# Altium PCB V2.5.0_ChipSat.PcbDoc (part 1 of 2)
Units mm, origin at the board's own origin, x right, y up, seen from the top; angles counter-clockwise.
Board outline 50 x 60 mm, 2 copper layers (Top Layer, Bottom Layer), stack 1.57 mm thick; 76 components, 53 nets, 284 pads, 115 vias.
Unrouted connection lines stored in the file: 2.
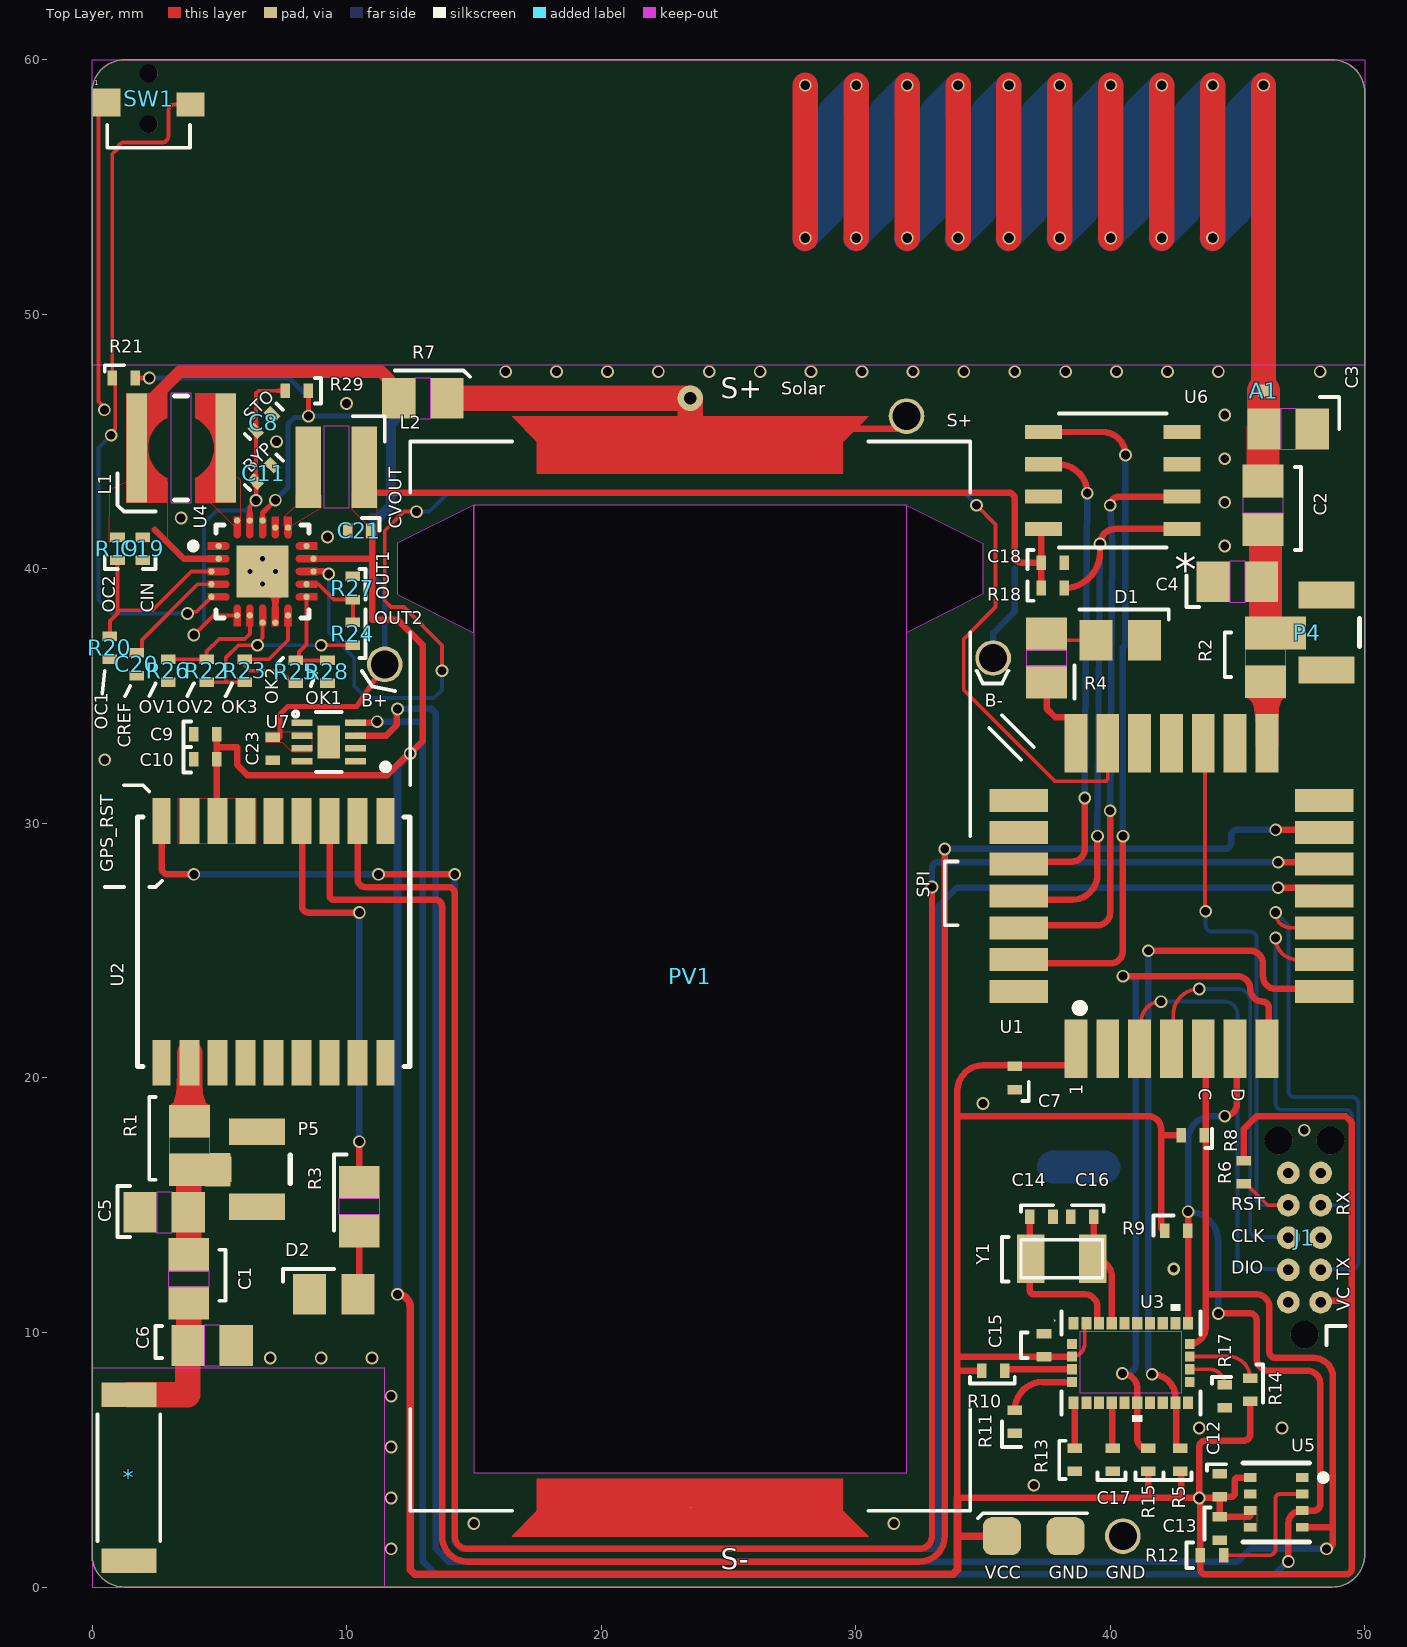
[diagram p0: Top Layer view]
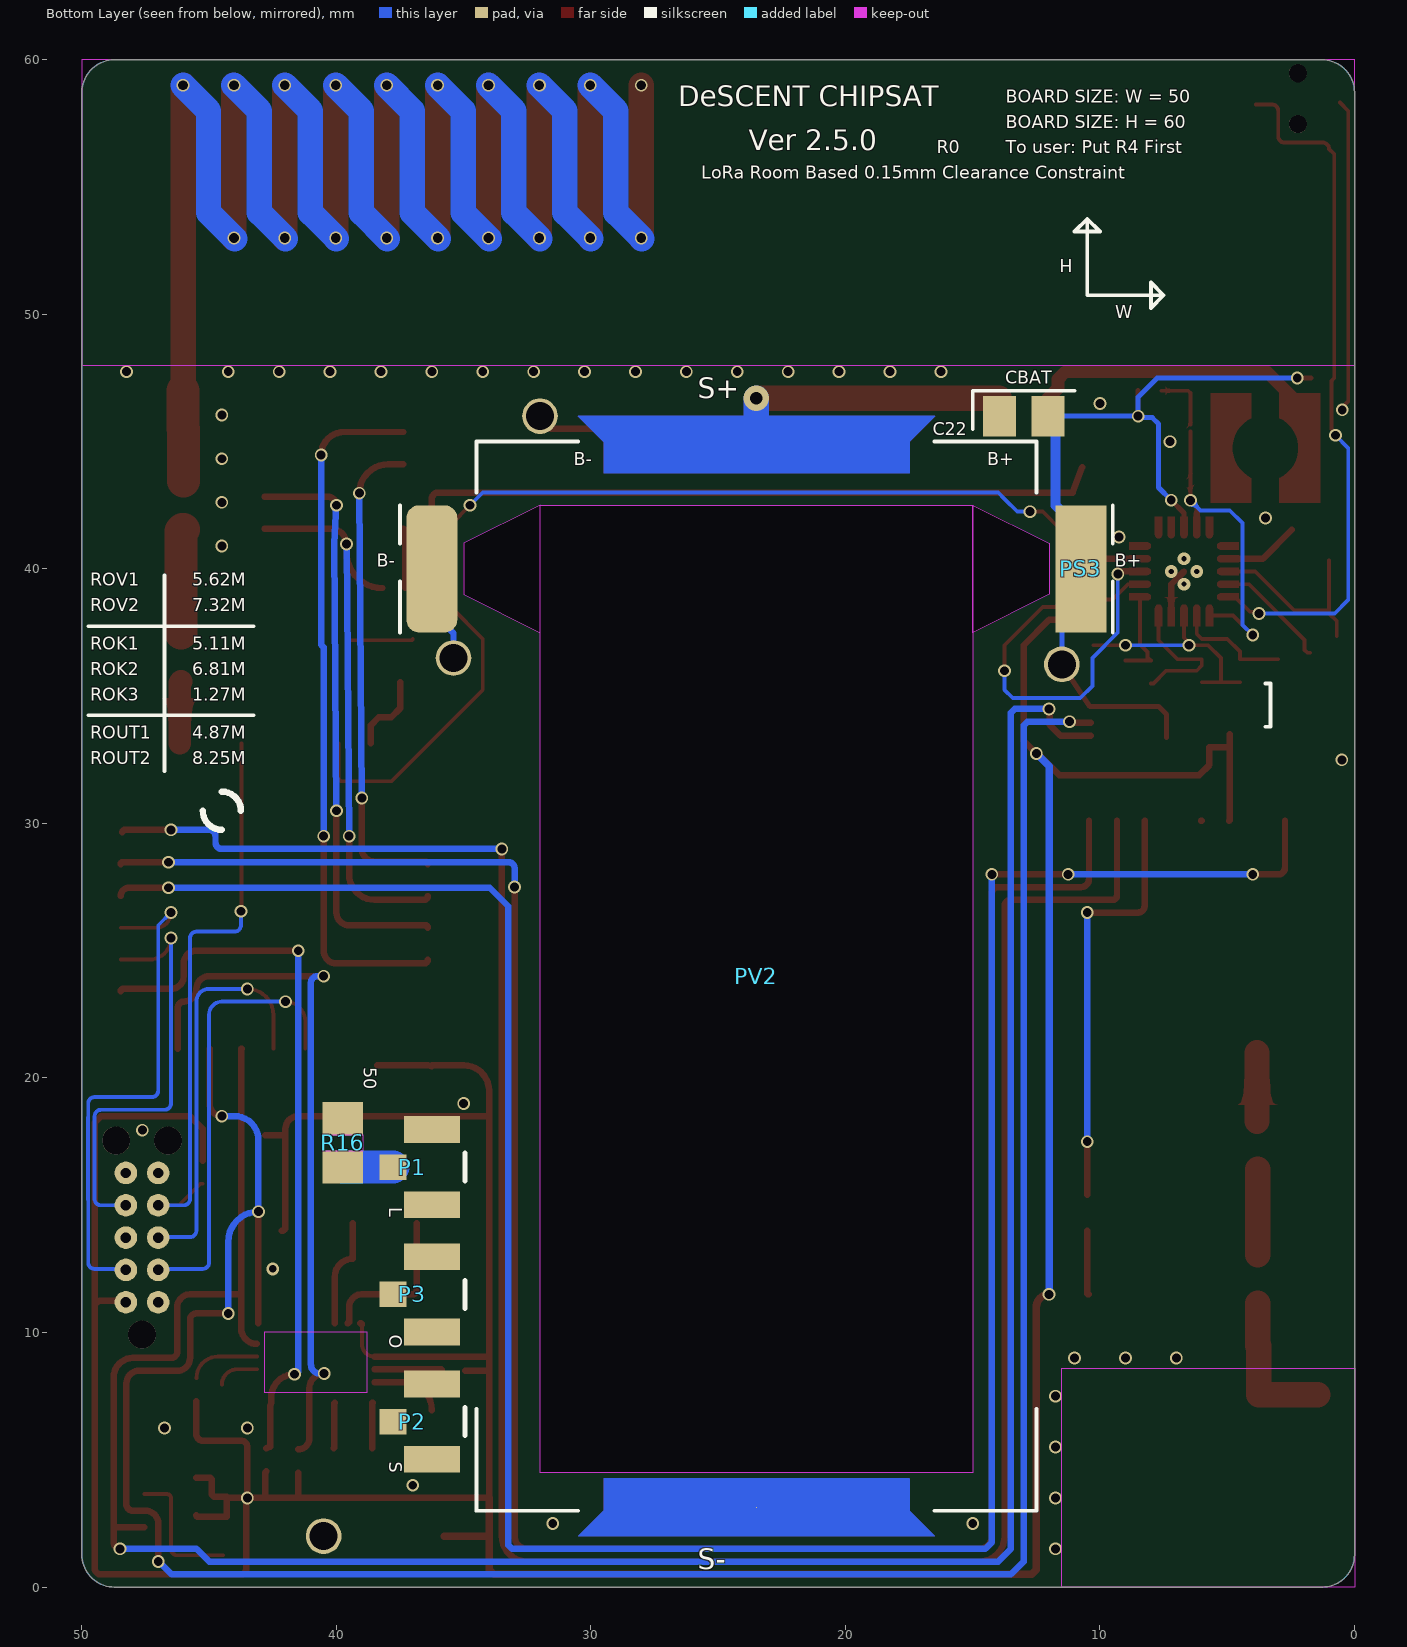
[diagram p1: Bottom Layer view, seen from below]

## Layer stack, top to bottom
Top Solder: solder mask 0.0254, SM-001, Dk 4
Top Layer: signal copper 0.035
Dielectric 1: dielectric 1.5, FR-4, Dk 4.8
Bottom Layer: signal copper 0.035
Bottom Solder: solder mask 0.0254, SM-001, Dk 4

## Board outline
1.27,0 cw(c1.27,1.27) 0,1.27 0,58.73 cw(c1.27,58.73) 1.27,60 48.73,60 cw(c48.73,58.73) 50,58.73 50,1.27 cw(c48.73,1.27) 48.73,0
cut-out: 15,42.5 12,41 12,39 15,37.5
cut-out: 32,42.5 35,41 35,39 32,37.5
cut-out: 32,4.5 32,42.5 15,42.5 15,4.5

## Design rules (kind name [scope] priority, off if disabled: settings)
Clearance GPS_Room [WithinRoom('GPS_Room_1')] p1: gap=0.125 ignorepadtopadclearanceinfootprint=TRUE
Clearance LoRa_Room [WithinRoom('LoRa_Room_1')] p2: gap=0.15 ignorepadtopadclearanceinfootprint=TRUE
Clearance [All] p3: gap=0.1 ignorepadtopadclearanceinfootprint=TRUE
ComponentClearance ComponentClearance_1 [InComponent('PV1') or InComponent('PV2')] p1: gap=0 collisioncheckmode=3 verticalgap=0 showdistances=FALSE donotcheckwithout3dbody=TRUE
ComponentClearance [All] p2: gap=0 collisioncheckmode=3 verticalgap=0 showdistances=FALSE donotcheckwithout3dbody=TRUE
MaxMinImpedance "Schematic Impedance Constraint_5" [InNet('GPS_ANT_Tuning')] p1: minimum=49.00 maximum=51.00
MaxMinImpedance "Schematic Impedance Constraint_4" [InNet('GPS_ANT')] p2: minimum=49.00 maximum=51.00
MaxMinImpedance "Schematic Impedance Constraint_3" [InNet('LoRa_ANT_Tuning')] p3: minimum=49.00 maximum=51.00
MaxMinImpedance "Schematic Impedance Constraint_2" [InNet('PI_NETWORK_LoRa')] p4: minimum=49.00 maximum=51.00
MaxMinImpedance "Schematic Impedance Constraint_1" [InNet('LoRa_ANT')] p5: minimum=49.00 maximum=51.00
MaxMinImpedance "Schematic Impedance Constraint" [InNet('PI_NETWORK_GPS')] p6: minimum=49.00 maximum=51.00
PlaneClearance [All] p1 off: clearance=0.508
PlaneConnect PlaneConnect_1 [InNet('VCC')] p1: planeconnectstyle=Direct reliefexpansion=0.508 reliefentries=4 reliefconductorwidth=0.254 reliefairgap=0.254
PlaneConnect [InNet('GND')] p2: planeconnectstyle=Direct reliefexpansion=0.508 reliefentries=4 reliefconductorwidth=0.254 reliefairgap=0.254
PolygonConnect PolygonConnect_grounding [InNet('GND') vs InNet('GND')] p1: thpad.connectstyle=Direct thpad.reliefconductorwidth=0.254 thpad.reliefentries=4 thpad.polygonreliefangle="90 Angle" thpad.airgapwidth=0.1 smdpad.connectstyle=Relief smdpad.reliefconductorwidth=0.254 smdpad.reliefentries=4 smdpad.polygonreliefangle="90 Angle" smdpad.airgapwidth=0.1 via.connectstyle=Direct via.reliefconductorwidth=0.254 via.reliefentries=4 via.polygonreliefangle="90 Angle" via.airgapwidth=0.1
PolygonConnect [All] p2: connectstyle=Direct reliefconductorwidth=0.254 reliefentries=4 polygonreliefangle="90 Angle" airgapwidth=0.1
RoomDefinition MCU_Room [False vs False] p1: confinementstyle=ConfineIn formatcopy=TRUE lockcomponents=FALSE outline 50,34.4 33.7,34.4 33.7,19.2 50,19.2
RoomDefinition GPS_Room_1 [False] p2: confinementstyle=ConfineIn formatcopy=TRUE lockcomponents=FALSE outline 0,21.75 6.5,21.75 6.5,8.25 0,8.25
RoomDefinition LoRa_Room_1 [False] p3: confinementstyle=ConfineIn formatcopy=TRUE lockcomponents=FALSE outline 44,48 50,48 50,34.5 44,34.5
RoutingVias [All] p1: holewidth=0.711 width=1.27 viastyle="Through Hole" minholewidth=0.711 minwidth=1.27 maxholewidth=0.711 maxwidth=1.27
SolderMaskExpansion [All] p1: expansion=0.102 istentingtop=FALSE
SupplyNets "Schematic Supply Nets_1" [InNet('VCC')] p1: voltage=0.000
SupplyNets "Schematic Supply Nets" [InNet('GND')] p2: voltage=0.000
Width Width_1 [All] p1 off: maxlimit=0.254 minlimit=0.254 preferedwidth=0.254
Width [All] p2: maxlimit=2 minlimit=0.14 preferedwidth=0.254 minimp=50.000000 maximp=50.000000 favimp=50.000000 checkconnectedcopper=TRUE // min width
27 further rules are at their usual default settings.

## Classes and differential pairs
polygon class PolygonClass_1: GND_L01_P006

## Components (designator, comment, footprint, x,y, rotation, side; value= is the part's Value field where it differs from the comment)
* "GPS_ANT_NO_KO" GPS_ANT_NO_KO 0.949,4.2 r90 top
A1 "TI_HELICAL" TI_HELICAL 28,47 r0 top
C1 "C0402C223K8PACTU" PI_NET_CAPACITOR_0805 3.802,12.104 r270 top value="22,000 pF"
C2 "C0402C223K8PACTU" PI_NET_CAPACITOR_0805 46,42.5 r90 top value="22,000 pF"
C3 "C0402C223K8PACTU" PI_NET_CAPACITOR_0805 47,45.5 r0 top value="22,000 pF"
C4 "C0402C223K8PACTU" PI_NET_CAPACITOR_0805 45,39.5 r180 top value="22,000 pF"
C5 "C0402C223K8PACTU" PI_NET_CAPACITOR_0805 2.837,14.72 r180 top value="22,000 pF"
C6 "C0402C223K8PACTU" PI_NET_CAPACITOR_0805 4.716,9.488 r0 top value="22,000 pF"
C7 "4.7uF" 0402CAP 36.25,20 r270 top value="22,000 pF"
C8 "4.7uF" 0402CAP 6.75,45.75 r45 top value="22,000 pF"
C9 "0.1uF" 0402CAP 4.454,33.5 r180 top value="22,000 pF"
C10 "10uF" 0402CAP 4.454,32.523 r180 top value="22,000 pF"
C11 "10nF" 0402CAP 6.75,43.75 r45 top value="22,000 pF"
C12 "0.1uF" 0402CAP 44.3,4 r90 top value="22,000 pF"
C13 "10uF" 0402CAP 44.3,2.3 r270 top value="22,000 pF"
C14 "22pF" 0402CAP 37.3,14.55 r0 top value="22,000 pF"
C15 "0.1uF" 0402CAP 37.4,9.5 r270 top value="22,000 pF"
C16 "22pF" 0402CAP 38.9,14.55 r180 top value="22,000 pF"
C17 "0.1uF" 0402CAP 40.1,5 r90 top value="22,000 pF"
C18 "10nF" 0402CAP 37.75,40.25 r0 top value="22,000 pF"
C19 "4.7uF - CIN" 0402CAP 2,40.796 r270 top value="22,000 pF"
C20 "10nF - CREF" 0402CAP 1.75,36.25 r270 top value="22,000 pF"
C21 "22uF - CVOUT" 0402CAP 10.5,41.5 r180 top value="22,000 pF"
C22 "47uF" 0805Cap 13,46 r0 bottom value="22,000 pF"
C23 "0.1uF" 0402CAP 7.1,32.93 r270 top value="22,000 pF"
D1 "LTST-C191TBKT" 0805LED 40.4,37.2 r180 top
D2 "LTST-C191TBKT" 0805LED 9.5,11.5 r0 top
J1 "TC-2050" JTAG_10p_SilkLess 47.635,13.73 r180 top
L1 "22uH" Inductor_Boost_BQ25570 3.5,44.75 r90 top
L2 "10uH" Inductor_Buck_BQ25570 9.6,44 r90 top
P1 "U.FL-R-SMT-1(01)" UFL 36.25,16.5 r270 bottom
P2 "U.FL-R-SMT-1(01)" UFL 36.25,6.5 r270 bottom
P3 "U.FL-R-SMT-1(01)" UFL 36.25,11.5 r270 bottom
P4 "U.FL-R-SMT-1(01)" UFL 48.5,37.5 r270 top
P5 "U.FL-R-SMT-1(01)" UFL 6.486,16.416 r270 top
PS3 "XmAh Lipo" Single_Bat_Pad 10.75,40 r270 bottom
PV1 "4.15V/184.3mW" SolarPanel_KXOB141K06TF-TR 23.5,24 r0 top
PV2 "4.15V/184.3mW" SolarPanel_KXOB141K06TF-TR 23.5,24 r180 bottom
R1 "0805Resistor" 0805Res 3.832,17.348 r270 top
R2 "0805Resistor" 0805Res 46.1,36.525 r90 top
R3 "1.6k" 0805Res 10.5,14.95 r270 top
R4 "1.6k" 0805Res 37.5,36.5 r90 top
R5 "10k" 0402 42.75,5 r90 top
R6 "10k" 0402 45.25,16.296 r90 top
R7 "0805Resistor" 0805Res 13,46.7 r180 top
R8 "2.2k" 0402 43.25,17.75 r180 top
R9 "2.2k" 0402 42.6,14 r180 top
R10 "10k" 0402 35.4,8.5 r0 top
R11 "10k" 0402 36.25,6.5 r90 top
R12 "4.7k" 0402 44,1.25 r180 top
R13 "10k" 0402 38.6,5 r90 top
R14 "10k" 0402 45.5,7.75 r270 top
R15 "10k" 0402 41.5,5 r90 top
R16 "0805Resistor" 0805Res 39.75,17.45 r90 bottom
R17 "10k" 0402 44.5,7.5 r270 top
R18 "10k" 0402 37.75,39.25 r180 top
R19 "4.02M - ROC2" 0402 1,40.796 r270 top
R20 "6.04M - ROC1" 0402 0.7,36.9 r270 top
R21 "10k" 0402 1.25,47.5 r180 top
R22 "7.32M -ROV2" 0402 4.5,36 r270 top
R23 "1.27M-ROK3" 0402 6,36 r270 top
R24 "8.25M-ROUT2" 0402 10.25,37.454 r270 top
R25 "6.81M-ROK2" 0402 8,35.954 r270 top
R26 "5.62M - ROV1" 0402 3,36 r90 top
R27 "4.87M-ROUT1" 0402 10.25,39.25 r270 top
R28 "5.11M - ROK1" 0402 9.25,35.954 r90 top
R29 "1k" 0402 8.046,47 r180 top
SW1 "D3SH-B1R1" Micro_Trigger_Switch_Long_D3SH-B1R1 2.225,59.625 r0 top
U1 "MODULE_LORA_E5" MODULE28P-1-25-12X12X2-5MM 42.405,27.15 r90 top
U2 "MAX-M10S-00B" GPS_MAX_10 7.132,25.348 r270 top
U3 "BNO085" QFN28_BNO086_CEV 40.814,8.805 r0 top
U4 "BQ25570RGRR" BQ25570_With_Vias 6.7,39.9 r0 top
U5 "BME280" FP-BME280-MFG 46.525,3.325 r0 top
U6 "W25Q16JVSNIQ" SOIC_150MIL_WIN 40.1,43.475 r180 top
U7 "MAX17048G+T10" MAX17048G+T10 9.3,33.2 r0 top
Y1 "32.768K" IMU_CLK_XTAL320X150X75 38.1,12.9 r180 top

## Footprints (in the part's own frame and the unit in brackets; to place one, negate y for a bottom-side part, rotate by r counter-clockwise, add the part's x,y. Pads: shape width x height; smd on the part's side, far side on the other; paste and mask are expansions set on the pad)
0402 [mm]
  rect 0.375x0.572 smd paste+0 mask+0: 1(-0.454,0) 2(0.454,0)
  body extent -0.5,-0.25 0.5,0.25, height 0.4
0402CAP [mm]
  rect 0.375x0.572 smd paste+0 mask+0: 1(-0.454,0) 2(0.454,0)
  body extent -0.5,-0.25 0.5,0.25, height 0.4
0805Cap [mm]
  rect 1.3x1.6 smd: 1(-0.95,0) 2(0.95,0)
  body extent -1,-0.63 1,0.63, height 0.7
0805LED [mm]
  rect 1.3x1.6 smd: 1(-0.95,0) 2(0.95,0)
  body extent -1,-0.63 1,0.63, height 1.1
0805Res [mm]
  rect 1.3x1.6 smd mask+0: 1(-0.95,0) 2(0.95,0)
  Top Layer keep-out region: -0.3,0.8 -0.3,-0.8 0.3,-0.8 0.3,0.8
  body extent -1,-0.63 1,0.63, height 0.6
BQ25570_With_Vias [mm] "BQ25570_CC"
  round 0.252 smd paste-1000 mask+0: 1(-1.725,1) 2(-1.725,0.5) 3(-2.01,0) 4(-2.01,-0.5) 5(-2.01,-1) 6(-1,-1.725) 7(-0.5,-1.725) 8(0,-2.01) 9(0.5,-2.01) 10(1,-1.725) 11(1.725,-1) 12(1.725,-0.5) 13(2,0) 14(2,0.5) 15(1.725,1) 16(1,1.725) 17(0.5,1.725) 18(0,2) 19(-0.5,2) 20(-1,2)
  rect 2.05x2.05 smd paste-1000 mask+0: 21(0,0)
  Top Layer region: -2.15,1.14 -1.44,1.14 -1.386,1.129 -1.341,1.099 -1.311,1.054 -1.3,1 -1.3,1 -1.311,0.946 -1.341,0.901 -1.386,0.871 -1.44,0.86 -1.44,0.86 -2.15,0.86
  Top Layer region: 0.36,-2.15 0.36,-1.44 0.371,-1.386 0.401,-1.341 0.446,-1.311 0.5,-1.3 0.5,-1.3 0.554,-1.311 0.599,-1.341 0.629,-1.386 0.64,-1.44 0.64,-1.44 0.64,-2.15
  Top Layer region: 0.64,2.15 0.64,1.44 0.629,1.386 0.599,1.341 0.554,1.311 0.5,1.3 0.5,1.3 0.446,1.311 0.401,1.341 0.371,1.386 0.36,1.44 0.36,1.44 0.36,2.15
  Top Layer region: 2.15,0.86 1.44,0.86 1.386,0.871 1.341,0.901 1.311,0.946 1.3,1 1.3,1 1.311,1.054 1.341,1.099 1.386,1.129 1.44,1.14 1.44,1.14 2.15,1.14
  Top Layer region: 2.15,0.36 1.44,0.36 1.386,0.371 1.341,0.401 1.311,0.446 1.3,0.5 1.3,0.5 1.311,0.554 1.341,0.599 1.386,0.629 1.44,0.64 1.44,0.64 2.15,0.64
  Top Layer region: 2.15,-0.14 1.44,-0.14 1.386,-0.129 1.341,-0.099 1.311,-0.054 1.3,0 1.3,0 1.311,0.054 1.341,0.099 1.386,0.129 1.44,0.14 1.44,0.14 2.15,0.14
  Top Layer region: 1.14,2.15 1.14,1.44 1.129,1.386 1.099,1.341 1.054,1.311 1,1.3 1,1.3 0.946,1.311 0.901,1.341 0.871,1.386 0.86,1.44 0.86,1.44 0.86,2.15
  Top Layer region: 0.14,2.15 0.14,1.44 0.129,1.386 0.099,1.341 0.054,1.311 0,1.3 0,1.3 -0.054,1.311 -0.099,1.341 -0.129,1.386 -0.14,1.44 -0.14,1.44 -0.14,2.15
  Top Layer region: 2.15,-0.64 1.44,-0.64 1.386,-0.629 1.341,-0.599 1.311,-0.554 1.3,-0.5 1.3,-0.5 1.311,-0.446 1.341,-0.401 1.386,-0.371 1.44,-0.36 1.44,-0.36 2.15,-0.36
  Top Layer region: 2.15,-1.14 1.44,-1.14 1.386,-1.129 1.341,-1.099 1.311,-1.054 1.3,-1 1.3,-1 1.311,-0.946 1.341,-0.901 1.386,-0.871 1.44,-0.86 1.44,-0.86 2.15,-0.86
  Top Layer region: 0.86,-2.15 0.86,-1.44 0.871,-1.386 0.901,-1.341 0.946,-1.311 1,-1.3 1,-1.3 1.054,-1.311 1.099,-1.341 1.129,-1.386 1.14,-1.44 1.14,-1.44 1.14,-2.15
  Top Layer region: -0.14,-2.15 -0.14,-1.44 -0.129,-1.386 -0.099,-1.341 -0.054,-1.311 0,-1.3 0,-1.3 0.054,-1.311 0.099,-1.341 0.129,-1.386 0.14,-1.44 0.14,-1.44 0.14,-2.15
  Top Layer region: -0.36,2.15 -0.36,1.44 -0.371,1.386 -0.401,1.341 -0.446,1.311 -0.5,1.3 -0.5,1.3 -0.554,1.311 -0.599,1.341 -0.629,1.386 -0.64,1.44 -0.64,1.44 -0.64,2.15
  Top Layer region: -0.86,2.15 -0.86,1.44 -0.871,1.386 -0.901,1.341 -0.946,1.311 -1,1.3 -1,1.3 -1.054,1.311 -1.099,1.341 -1.129,1.386 -1.14,1.44 -1.14,1.44 -1.14,2.15
  Top Layer region: -2.15,0.64 -1.44,0.64 -1.386,0.629 -1.341,0.599 -1.311,0.554 -1.3,0.5 -1.3,0.5 -1.311,0.446 -1.341,0.401 -1.386,0.371 -1.44,0.36 -1.44,0.36 -2.15,0.36
  Top Layer region: -0.64,-2.15 -0.64,-1.44 -0.629,-1.386 -0.599,-1.341 -0.554,-1.311 -0.5,-1.3 -0.5,-1.3 -0.446,-1.311 -0.401,-1.341 -0.371,-1.386 -0.36,-1.44 -0.36,-1.44 -0.36,-2.15
  Top Layer region: -1.14,-2.15 -1.14,-1.44 -1.129,-1.386 -1.099,-1.341 -1.054,-1.311 -1,-1.3 -1,-1.3 -0.946,-1.311 -0.901,-1.341 -0.871,-1.386 -0.86,-1.44 -0.86,-1.44 -0.86,-2.15
  Top Layer region: -2.15,-0.86 -1.44,-0.86 -1.386,-0.871 -1.341,-0.901 -1.311,-0.946 -1.3,-1 -1.3,-1 -1.311,-1.054 -1.341,-1.099 -1.386,-1.129 -1.44,-1.14 -1.44,-1.14 -2.15,-1.14
  Top Layer region: -2.15,0.14 -1.44,0.14 -1.386,0.129 -1.341,0.099 -1.311,0.054 -1.3,0 -1.3,0 -1.311,-0.054 -1.341,-0.099 -1.386,-0.129 -1.44,-0.14 -1.44,-0.14 -2.15,-0.14
  Top Layer region: -2.15,-0.36 -1.44,-0.36 -1.386,-0.371 -1.341,-0.401 -1.311,-0.446 -1.3,-0.5 -1.3,-0.5 -1.311,-0.554 -1.341,-0.599 -1.386,-0.629 -1.44,-0.64 -1.44,-0.64 -2.15,-0.64
  silkscreen extent -2.85,-1.83 1.83,1.83, body extent -2.25,-2.25 2.25,2.25, height 0.25
FP-BME280-MFG [mm]
  rect 0.5x0.35 smd paste+0 mask+0: 1(1.025,0.975) 2(1.025,0.325) 3(1.025,-0.325) 4(1.025,-0.975) 5(-1.025,-0.975) 6(-1.025,-0.325) 7(-1.025,0.325) 8(-1.025,0.975)
  silkscreen extent -1.3,-1.55 1.97,1.55, body extent -1.25,-1.25 1.25,1.25, height 1
GPS_ANT_NO_KO [mm]
  rect 0.963x2.16 smd paste+0 mask+0: 1(3.363,-0.5) 2(-3.163,-0.5)
  silkscreen extent -2.39,-1.73 2.59,0.73, body extent -3.49,-1.6 3.69,0.61, height 0.89
GPS_MAX_10 [mm]
  rect 1.8x0.7 smd paste-1000 mask+0: 1(-4.75,4.4) 9(-4.75,-4.4) 10(4.75,-4.4) 18(4.75,4.4)
  rect 1.8x0.8 smd paste-1000 mask+0: 2(-4.75,3.3) 3(-4.75,2.2) 4(-4.75,1.1) 5(-4.75,0) 6(-4.75,-1.1) 7(-4.75,-2.2) 8(-4.75,-3.3) 11(4.75,-3.3) 12(4.75,-2.2) 13(4.75,-1.1) 14(4.75,0) 15(4.75,1.1) 16(4.75,2.2) 17(4.75,3.3)
  silkscreen extent -7,-5.35 4.9,5.35, body extent -5.75,-5.45 5.75,5.45, height 0.25
IMU_CLK_XTAL320X150X75 [mil]
  rect 43x75 smd: 1(-48,0) 2(48,0)
  silkscreen extent -63,-30 63,30, body extent -63,-30 63,30, height 33
Inductor_Boost_BQ25570 [mm] "Power Inductor, SMD, 2-Leads, body 3.8x3.8mm / 744031220 / Wuerth"
  rect 4.3x0.8 smd paste-403.566 mask-403.566: 1(0,1.75) 2(0,-1.75)
  Top Layer region: 2.15,-0.55 2.15,-2.15 -2.15,-2.15 -2.15,-0.55 -1.178,-0.55 -1.178,-0.55 -0.818,-1.01 -0.293,-1.267 0.292,-1.267 0.818,-1.011 1.178,-0.55 1.178,-0.55 1.178,-0.55
  Top Layer region: -2.15,0.55 -2.15,2.15 2.15,2.15 2.15,0.55 1.178,0.55 1.178,0.55 0.818,1.01 0.293,1.267 -0.292,1.267 -0.818,1.011 -1.178,0.55 -1.178,0.55 -1.178,0.55
  Top Layer keep-out region: -2.15,-0.4 2.15,-0.4 2.15,0.4 -2.15,0.4
  silkscreen extent -2.05,-0.25 2.05,0.25, body extent -1.9,-1.9 1.9,1.9, height 1.62
Inductor_Buck_BQ25570 [mm] "Power Inductor, SMD, 2-Leads, body 2.78x2.78mm / 744029100 / Wuerth"
  rect 3.2x1 smd: 1(0,1.1) 2(0,-1.1)
  Top Layer keep-out region: -1.6,-0.5 1.6,-0.5 1.6,0.5 -1.6,0.5
  body extent -1.39,-1.39 1.39,1.39, height 1.17
JTAG_10p_SilkLess [mil]
  round 35 hole 16: 1(-25,100) 2(25,100) 3(-25,50) 4(25,50) 5(-25,0) 6(25,0) 7(-25,-50) 8(25,-50) 9(-25,-100) 10(25,-100)
  round 43 hole 43 unplated mask+0: ""(-40,-150) ""(0,150) ""(40,-150)
MAX17048G+T10 [mil] "https://www.digikey.com/en/products/detail/analog-devices-inc-maxim-integrated/MAX17048G-T10/3758921"
  rect 32x10 smd paste+0 mask+0: 1(-41.5,29.53) 2(-41.5,9.84) 3(-41.5,-9.84) 4(-41.5,-29.53) 5(41.5,-29.53) 6(41.5,-9.84) 7(41.5,9.84) 8(41.5,29.53)
  rect 35x51 smd paste+0 mask+0: 9(0,0)
  silkscreen extent -55,-46 20,47, body extent -41,-41 41,41, height 32
Micro_Trigger_Switch_Long_D3SH-B1R1 [mm] "Micro_Trigger_Switch_D3SH-B1R1"
  rect 1.1x1.1 smd paste+0 mask+0: 1(-1.65,-1.3)
  rect 1.1x0.95 smd paste+0 mask+0: 2(1.65,-1.375)
  round 0.7 / inner round 1.524 / far side round 0.7 hole 0.711 paste-2539.97 mask-0.356: 3(0,-0.15) 4(0,-2.15)
  silkscreen extent -1.63,-3.08 1.63,-2.18, body extent -1.91,-2.95 2.48,2.45, height 0.9
MODULE28P-1-25-12X12X2-5MM [mm]
  rect 2.3x0.9 smd: 1(-6,3.75) 2(-6,2.5) 3(-6,1.25) 4(-6,0) 5(-6,-1.25) 6(-6,-2.5) 7(-6,-3.75) 15(6,-3.75) 16(6,-2.5) 17(6,-1.25) 18(6,0) 19(6,1.25) 20(6,2.5) 21(6,3.75)
  rect 0.9x2.3 smd: 8(-3.75,-6) 9(-2.5,-6) 10(-1.25,-6) 11(0,-6) 12(1.25,-6) 13(2.5,-6) 14(3.75,-6) 22(3.75,6) 23(2.5,6) 24(1.25,6) 25(0,6) 26(-1.25,6) 27(-2.5,6) 28(-3.75,6)
  silkscreen extent -4.53,3.47 -4.27,3.73, body extent -7.15,-7.15 7.15,7.15, height 2.49
PI_NET_CAPACITOR_0805 [mm] "0805 ko in pi net"
  rect 1.3x1.6 smd mask+0: 1(-0.95,0) 2(0.95,0)
  Top Layer keep-out region: -0.3,0.8 -0.3,-0.8 0.3,-0.8 0.3,0.8
  body extent -1,-0.63 1,0.63, height 0.6
QFN28_BNO086_CEV [mil]
  rect 15.75x19 smd paste+0 mask+0: 1(-88.58,61.5) 6(-88.58,-61.5) 7(-68.9,-61.5) 8(-49.21,-61.5) 9(-29.53,-61.5) 10(-9.84,-61.5) 11(9.84,-61.5) 12(29.53,-61.5) 13(49.21,-61.5) 14(68.9,-61.5) 15(88.58,-61.5) 20(88.58,61.5) 21(68.9,61.5) 22(49.21,61.5) 23(29.53,61.5) 24(9.84,61.5) 25(-9.84,61.5) 26(-29.53,61.5) 27(-49.21,61.5) 28(-68.9,61.5)
  rect 15x15.75 smd paste+0 mask+0: 2(-91,29.53) 3(-91,9.84) 4(-91,-9.84) 5(-91,-29.53) 16(91,-29.53) 17(91,-9.84) 18(91,9.84) 19(91,29.53)
  silkscreen extent -108,-91 107,91, body extent -102,-75 102,75, height 46
Single_Bat_Pad [mm] "This is kinda stupid. but its a single bat pad"
  rect 5x2 smd: 1(0,0)
SOIC_150MIL_WIN [mil]
  rect 57.5x22 smd paste+0 mask+0: 1(-107.25,75) 2(-107.25,25) 3(-107.25,-25) 4(-107.25,-75) 5(107.25,-75) 6(107.25,-25) 7(107.25,25) 8(107.25,75)
  silkscreen extent -84,-104 84,104, body extent -122,-99 122,99, height 69
SolarPanel_KXOB141K06TF-TR [mil] "KXOB141K06TF-TR"
  round 1 smd paste-99999 mask+0: 1(0,821.85) 2(0,-821.85)
  Top Layer region: -275.59,-866.14 275.59,-866.14 236.22,-826.77 236.22,-777.56 -236.22,-777.56 -236.22,-826.77
  Top Layer region: -236.22,777.56 236.22,777.56 236.22,826.77 275.59,866.14 -275.59,866.14 -236.22,826.77
  Top Layer lines w0.39: -275.59,-866.14 -236.22,-826.77 -236.22,-777.56 236.22,-777.56 236.22,-826.77 275.59,-866.14 -275.59,-866.14 ; -275.59,866.14 -236.22,826.77 -236.22,777.56 236.22,777.56 236.22,826.77 275.59,866.14 -275.59,866.14
  silkscreen extent -433,-827 433,827, body extent -433,-827 433,827, height 47
TI_HELICAL [mm] "https://www.ti.com/lit/an/swra416/swra416.pdf?ts=1758177641491&ref_url=https%253A%252F%252Fduckduckgo.com%252F"
  rrect50% 0.5x0.5 smd paste-2539.97 mask+0: 1(18.024,0)
  Top Layer lines w1: 0.024,6 0.024,12 ; 2.024,6 2.024,12 ; 4.024,6 4.024,12 ; 6.024,6 6.024,12 ; 8.024,6 8.024,12 ; 10.024,6 10.024,12 ; 12.024,6 12.024,12 ; 14.024,6 14.024,12 ; 16.024,6 16.024,12 ; 18.024,0 18.024,12
  Bottom Layer lines w1: 0,5.977 1,6.977 ; 1.024,7.001 1.024,11 2.024,12 ; 2,5.977 3,6.977 ; 3.024,7.001 3.024,11 4.024,12 ; 4,5.977 5,6.977 ; 5.024,7.001 5.024,11 6.024,12 ; 6,5.977 7,6.977 ; 7.024,7.001 7.024,11 8.024,12 ; 8,5.977 9,6.977 ; 9.024,7.001 9.024,11 10.024,12 ; 10,5.977 11,6.977 ; 11.024,7.001 11.024,11 12.024,12 ; 12,5.977 13,6.977 ; 13.024,7.001 13.024,11 14.024,12 ; 14,5.977 15,6.977 ; 15.024,7.001 15.024,11 16.024,12 ; 16,5.977 17,6.977 ; 17.024,7.001 17.024,11 18.024,12
UFL [mm] "SMT, 3-Leads, Body 2.6x2.6mm"
  rect 1.05x2.2 smd: 1(-1.475,0) 2(1.475,0)
  rect 1x1.05 smd: 3(0,-1.525)
  silkscreen extent -0.55,1.3 0.55,1.3, body extent -1.3,-1.3 1.3,1.3, height 1.25

## Part data
* A1: "helical_antenna schematic for the DeSCENT v1 ChipSat"
C1 C2 C3 C4 C5 C6: library part 0805RFCapacitor_NO_SILK, "CAP0805", Capacitance="22,000 pF", Manufacturer=Kemet, Package=C0402-BB, Temperature="-55°C to +125°C", Temperature Characteristic=X5R, Temperature Coefficient=15%, Temperature Range High=+125°C, Temperature Range Low=-55°C, Tolerance=0.1, Voltage Rating="10 V", Automotive=No, Category=Cap, ComponentLink2Description=Datasheet, ComponentLink2URL=https://content.kemet.com/datasheets/KEM_C1002_X7R_SMD.pdf, Device Class L1="Passive Components", Device Class L2=Capacitors, Device Class L3="Ceramic Capacitors", Digikey Description="CAP CER 0.022UF 10V X5R 0402", Height=0.55mm, Ipc Land Pattern Name=CAPC10050X50, Lead Free=Yes, Manufacturer Part Number=C0402C223K8PACTU, Material=Ceramic, Mouser Description="Multilayer Ceramic Capacitors MLCC - SMD/SMT 10volts 22000pF X5R 10%", Octopart=https://octopart.com/c0402c223k8pactu-kemet-140074, RoHS=TRUE
C7 C8 C9 C10 C11 C12 C13 C14 C15 C16 C17 C18 C19 C20: library part 0402Capacitor, Capacitance="22,000 pF", Manufacturer=Kemet, Manufacturer Part Number=C0402C223K8PACTU, Package=C0402-BB, Temperature="-55°C to +125°C", Temperature Characteristic=X5R, Temperature Coefficient=15%, Temperature Range High=+125°C, Temperature Range Low=-55°C, Tolerance=0.1, Voltage Rating="10 V", Automotive=No, Category=Cap, ComponentLink2Description=Datasheet, ComponentLink2URL=https://content.kemet.com/datasheets/KEM_C1002_X7R_SMD.pdf, Device Class L1="Passive Components", Device Class L2=Capacitors, Device Class L3="Ceramic Capacitors", Digikey Description="CAP CER 0.022UF 10V X5R 0402", Height=0.55mm, Ipc Land Pattern Name=CAPC10050X50, Lead Free=Yes, Material=Ceramic, Mouser Description="Multilayer Ceramic Capacitors MLCC - SMD/SMT 10volts 22000pF X5R 10%", Octopart=https://octopart.com/c0402c223k8pactu-kemet-140074, RoHS=TRUE
C21 C23: library part 0402Capacitor, "CVOUT", Capacitance="22,000 pF", Manufacturer=Kemet, Manufacturer Part Number=C0402C223K8PACTU, Package=C0402-BB, Temperature="-55°C to +125°C", Temperature Characteristic=X5R, Temperature Coefficient=15%, Temperature Range High=+125°C, Temperature Range Low=-55°C, Tolerance=0.1, Voltage Rating="10 V", Automotive=No, Category=Cap, ComponentLink2Description=Datasheet, ComponentLink2URL=https://content.kemet.com/datasheets/KEM_C1002_X7R_SMD.pdf, Device Class L1="Passive Components", Device Class L2=Capacitors, Device Class L3="Ceramic Capacitors", Digikey Description="CAP CER 0.022UF 10V X5R 0402", Height=0.55mm, Ipc Land Pattern Name=CAPC10050X50, Lead Free=Yes, Material=Ceramic, Mouser Description="Multilayer Ceramic Capacitors MLCC - SMD/SMT 10volts 22000pF X5R 10%", Octopart=https://octopart.com/c0402c223k8pactu-kemet-140074, RoHS=TRUE
C22: library part 0805Capacitor, "CAP CER 0.022UF 10V X5R 0402", Capacitance="22,000 pF", Manufacturer=Kemet, Manufacturer Part Number=C0402C223K8PACTU, Package=C0402-BB, Temperature="-55°C to +125°C", Temperature Characteristic=X5R, Temperature Coefficient=15%, Temperature Range High=+125°C, Temperature Range Low=-55°C, Tolerance=0.1, Voltage Rating="10 V", Automotive=No, Category=Cap, ComponentLink2Description=Datasheet, ComponentLink2URL=https://content.kemet.com/datasheets/KEM_C1002_X7R_SMD.pdf, Device Class L1="Passive Components", Device Class L2=Capacitors, Device Class L3="Ceramic Capacitors", Digikey Description="CAP CER 0.022UF 10V X5R 0402", Height=0.55mm, Ipc Land Pattern Name=CAPC10050X50, Lead Free=Yes, Material=Ceramic, Mouser Description="Multilayer Ceramic Capacitors MLCC - SMD/SMT 10volts 22000pF X5R 10%", Octopart=https://octopart.com/c0402c223k8pactu-kemet-140074, RoHS=TRUE
D1 D2: library part 0805LED, "LED BLUE CLEAR CHIP SMD", Case Code (Imperial)=0603, Case Code (Metric)=1608, Color=Blue, Forward Current=20mA, Forward Voltage=3.8V, Lens Color=Colorless, Max Operating Temperature=80°C, Max Power Dissipation=75mW, Min Operating Temperature=-20°C, Package Quantity=1, Power Dissipation=76mW, Reverse Voltage=5V, Case/Package=0603, Depth=1.6mm, Dominant Wavelength=475nm, Height=0.55mm, Illumination Color=Blue, Lead Free="Lead Free", Length=0.8mm, Lens Style=Diffused, Lens Transparency=Clear, Luminous Intensity=180mcd, Mount="Surface Mount", Number of Elements=1, Number of LEDs=1, Number of Pins=2, Packaging="Tape and Reel", Radiation Hardening=No, Test Current=20mA, Viewing Angle=130°, Wavelength=468nm, Width=0.8mm
J1: library part JTAG_10p_SilkLess, "JTAG 10Pos Connector"
L1: library part Inductor_Boost_BQ25570, "744031220", Ambient Temperature Range High=95°C, Ambient Temperature Range Low=-40°C, Current Rating=510mA, DC Resistance (DCR)=410mΩ, Inductance=22µH, Inductance Tolerance=30%, Max Operating Temperature=125°C, Saturation Current=360mA, Self Resonant Frequency=26MHz, Series Resistance=450mΩ, Test Frequency=100kHz, Composition=Wirewound, Core Material=Ferrite, Height=1.65mm, Length=3.8mm, Min Operating Temperature=-40°C, NexarPartId=22866169, Number of Pins=2, Packaging="Tape & Reel (TR)", RMS Current (Irms)=510mA, RoHS=Compliant, Tolerance=30%, Width=3.8mm
L2: library part Inductor_Buck_BQ25570, "744029100", Ambient Temperature Range High=85°C, Ambient Temperature Range Low=-40°C, Case/Package=Nonstandard, Current Rating=650mA, DC Resistance (DCR)=390mΩ, Inductance=10µH, Inductance Tolerance=30%, Max DC Current=800mA, Max Operating Temperature=125°C, Saturation Current=500mA, Self Resonant Frequency=40MHz, Series Resistance=300mΩ, Test Frequency=100kHz, Composition=Wirewound, Core Material=Ferrite, Depth=2.8mm, Height=1.35mm, Height - Seated (Max)=1.4986mm, Lead Free="Lead Free", Length=2.78mm, Min Operating Temperature=-40°C, Mount="Surface Mount", NexarPartId=8917062, Number of Pins=2, Packaging="Cut Tape (CT)", REACH SVHC=Unknown, Resistance=390mΩ, RMS Current (Irms)=650mA, RoHS=Compliant, Shielding=Shielded, Termination=SMD/SMT, Tolerance=30%, Weight=32.006612mg, Width=2.78mm
P1 P2 P3 P4 P5: library part UFL, "Ultra Small Coaxial Connector, 6 GHz, -40 to 90 degC, 3-Pin SMD, RoHS, Bulk", Dielectric Material=LiquidCrystalPolymer(LCP), Frequency - Max=6GHz, Housing Color=Silver, Manufacturer="Hirose Electric", Operating Temperature=-40degC~90degC, Package Description="3-Pin Surface Mount Device, Body 2.6 x 2.6 mm", Package Reference=U.FL-R-SMT, Standard Package=100, Body Finish=Silver, Body Material=PhosphorBronze, Category=Connectors,Interconnects, Center Contact Material=PhosphorBronze, Center Contact Plating=Gold, Connector Style=U.FL, Connector Type=Jack,MalePin, Contact Termination=Solder, Datasheet URL=https://datasheet.ciiva.com/26945/getdatasheetpartid-475239-26945414.pdf, Datasheet Version=Feb-09, Dynamic Catalog=U.FLSeries, Family=CoaxialConnectors(RF), Fastening Type=Snap-On, Featured Product=HiroseU.FLSeries, Impedance=50Ohm, Manufacturer URL=https://www.hirose.com, Minimum Quantity=UltraMiniatureCoaxial, Mounting Type=SurfaceMount, Online Catalog=U.FLSeries, Other Names="H122041 / U.FL-R-SMT-1(01)-ND", Packaging=Bulk, Quantity Available=Bulk, Series=U.FL, Shield Termination=Solder, Unit PriceUSD=U.FL
PS3: library part Single_BAT_PAD, "No SILK", DeviceSetName=ALTA_CELL, GateName_1=G$1, LibraryName=ALTA_CELL, SymbolName_1=ALTA_CELL
PV1 PV2: library part SolarPanel_KXOB141K06TF-TR, "KXOB141K06TF-TR / https://www.digikey.com/en/products/detail/anysolar-ltd/KXOB141K06TF-TR/13999140?s=N4IgTCBcDaINIA0DyAhAjAFjXADANgBUAxAWgICUAdSkAXQF8g"
R1 R2 R7 R16: "RESISTOR, European symbol", DeviceName=M0805, DeviceSetName=R-EU_, GateName_1=G$1, LibraryName=rcl, SymbolName_1=R-EU
R3 R4: library part 0805Resistor, "RF RESISTOR", DeviceName=M0805, DeviceSetName=R-EU_, GateName_1=G$1, LibraryName=rcl, SymbolName_1=R-EU
R5 R6 R8 R9 R10 R11 R12 R13 R14 R15 R17 R18 R19 R20 R21 R22 R23 R24 R25 R26 R27 R28 R29: library part 0402Resistor, "RESISTOR, European symbol", DeviceName=M0805, DeviceSetName=R-EU_, GateName_1=G$1, LibraryName=rcl, SymbolName_1=R-EU
SW1: library part Micro_Trigger_Switch_Long_D3SH-B1R1, "Micro_Trigger_Switch_Long_D3SH-B1R1", Manufacturer_Name=Omron, Copyright="Copyright (C) 2025 Ultra Librarian. All rights reserved.", Manufacturer_Part_Number=D3SH-B1R1, RefDes=RefDes, Type=Type
U1: Package=MODULE28P-1.25-12X12X2.5MM, DeviceSetName=MODULE_LORA_E5, GateName_1=G$1, LibraryName=LORA-E5_Eagle_Library, SymbolName_1=MOUDLE_LORA_E5
U2: library part GPS_MAX_10, "GNSS LCC RX, ROM, TCXO, LNA, SAW"
U3: library part BNO086, "No Description Available", Mfr_Name=CEVA, RefDes=RefDes, Type="Motion Sensors"
U4: library part BQ25570_PIN_ARRANGE, "IC ENERGY HARV CTRLR BATT 20VQFN", Case/Package=VQFN, Max Operating Temperature=125°C, Min Operating Temperature=-40°C, Operating Supply Current=488nA, Operating Supply Voltage=4V, Output Current=100mA, Package Quantity=3000, Switching Frequency=1MHz, Contact Plating=Gold, Lead Free="Lead Free", Mount="Surface Mount", Number of Pins=20, Packaging="Tape and Reel", RoHS Compliant=Yes
U5: "Temp and huminity sensor"
U6: "No Description Available", Mfr_Name=Winbond, RefDes=RefDes, Type=Type
U7: "3ÂµA 1-Cell/2-Cell Fuel Gauge with ModelGauge /  / https://www.digikey.com/en/products/detail/analog-devices-inc-maxim-integrated/MAX17048G-T10/3758921", Manufacturer_Name="Analog Devices Inc", Copyright="Copyright (C) 2026 Ultra Librarian. All rights reserved.", Manufacturer_Part_Number=MAX17048G+T10, RefDes=RefDes, Type=Type
Y1: library part IMU_CLK_9HT10-32.768KBZF-T, "32.768 kHz Â±50ppm Crystal 12.5pF 70 kOhms 2-SMD, No Lead", Package="SMD-2 TXC Corporation", Check_prices=https://www.snapeda.com/parts/9HT10-32.768KBZF-T/TXC/view-part/?ref=eda, MF=TXC, MP=9HT10-32.768KBZF-T, SnapEDA_Link=https://www.snapeda.com/parts/9HT10-32.768KBZF-T/TXC/view-part/?ref=snap

## Free pads (board coordinates)
  rect 1x1.3 smd: 1(47.193,37.48) 3(4.945,16.397)
  rect 0.5x1 smd: 2(3.794,16.412)
  rrect50% 2x5 smd far side paste-2539.97 mask+0.102: 4(36.25,40)
  round 1.4 hole 1.1 paste-2539.97 mask+0.102: 5(11.5,36.25) 5(32,46) 5(35.4,36.5) 5(40.5,2)
  rrect50% 1.5x1.5 smd: GND(38.25,2) VCC(35.75,2)

## Via types
v1: diameter 0.5, hole 0.35, Top Layer to Bottom Layer, tented both sides, 63 vias
v2: diameter 0.5, hole 0.35, Top Layer to Bottom Layer, 27 vias
v3: diameter 0.5, hole 0.38, Top Layer to Bottom Layer, 19 vias
v4: diameter 0.5, hole 0.2, Top Layer to Bottom Layer, 4 vias
v5: diameter 0.5, hole 0.3, Top Layer to Bottom Layer, tented both sides, 1 vias
v6: diameter 1, hole 0.5, Top Layer to Bottom Layer, tented both sides, 1 vias

## Nets (pads, with @x,y where several pads share a name; then routed paths per layer and width w, separated by ;. In a path a pad name is that pad's centre, name@x,y a point inside that pad or via, vN(x,y) a via of type N, cw(c..) or ccw(c..) an arc to the next point about the centre after c; other vN are vias at no path point)
Bat_Positive: C22.1 C23.1 pad.5@11.5,36.25 PS3.1 R21.1 R29.1 U4.18 U7.2 U7.3 | length 32
  Top Layer w0.2: R21.1 v1(2.25,47.5) ; U4.18 6.7,42.2 v1(7.2,42.7) ; 7.386,33.384 7.386,34.286 7.7,34.6 10.4,34.6 pad.5@11.5,36.25 ; v1(8.5,46) R29.1
  Bottom Layer w0.2: v1(2.25,47.5) 7.75,47.5 8.5,46.75 v1(8.5,46) ; v1(7.2,42.7) 7.7,43.2 7.7,45.7 7.943,45.943 8.443,45.943 v1(8.5,46) ; PS3.1 11.5,39.25 pad.5@11.5,36.25 ; C22.1@11.798,46 v1(8.5,46)
  Bottom Layer w0.4: PS3.1@11,42 11.25,42 11.75,42.5 11.75,45.7 C22.1
BQ_VBAT_OK: U1.20 U4.13 | length 57.2
  Top Layer w0.15: 12.5,42.25 12.25,42.25 11.5,41.5 11.5,38.75 11.75,38.5 12.25,38.5 13.75,37 v1(13.75,36) ; v1(34.75,42.5) 35.5,41.75 35.5,38.5 34.25,37.25 34.25,35.25 37.845,31.655 39.817,31.655 39.905,31.743 U1.20
  Top Layer w0.254: U4.13 9.059,39.9 cw(c9.059,39.559) v1(9.3,39.8)
  Bottom Layer w0.15: v1(9.3,39.8) 9.3,37.5 10.3,36.5 10.3,35.4 10.775,34.925 13.425,34.925 13.75,35.25 v1(13.75,36) ; v1(12.75,42.25) 13.25,42.25 13.75,42.75 14,43 34.25,43 v1(34.75,42.5)
CS: R18.1 U1.25 U6.1 | length 22.8
  Top Layer w0.254: U1.25 ccw(c36.555,27.15) 36.555,27 38.5,27 ccw(c38.5,28) 39.5,28 v1(39.5,29.5) ; R18.1 ccw(c38.204,40.646) 39.6,40.646 v1(39.6,40.975) cw(c40.195,40.975) 40.195,41.57 U6.1
  Bottom Layer w0.254: v1(39.5,29.5) v1(39.6,40.975)
GND: C3.2 C4.2 C5.2 C6.2 C7.2 C8.2 C9.2 C10.2 C11.2 C12.2 C13.2 C14.2 C15.1 C16.2 C17.1 C18.2 C19.2 C20.2 C21.2 C22.2 C23.2 D1.1 D2.1 J1.2 J1.5 J1.9 J1.10 P1.1 P1.2 P2.1 P2.2 P2.3 P3.1 P3.2 P4.1 P4.2 P5.1 P5.2 pad.4 pad.5@35.4,36.5 pad.5@40.5,2 pad.GND PV1.2 PV2.2 R11.1 R13.1 R16.2 R17.2 R20.2 R26.1 R27.1 R28.1 SW1.1 U1.2 U1.14 U1.16 U1.22 U2.1 U2.10 U2.12 U3.2 U3.10 U3.25 U4.1 U4.9 U4.15 U4.17 U4.21 U5.1 U5.7 U6.4 U7.1 U7.4 U7.6 U7.9 | length 18.4
  Top Layer w0.15: v1(0.483,46.25) 0.483,46.345 0.25,46.578 0.25,58 SW1.1
  Top Layer w0.25: U4.21 7.2,39.4 U4.9
  Bottom Layer w0.25: pad.5@35.4,36.5 35.4,37.475 36.25,38.325 pad.4
  other v1: 15,2.5 31.5,2.5 37,4 43.5,6.25 46.75,6.25 47.625,17.95 35,19 0.5,32.5 9.25,41.25 3.5,42 7.25,45 10,46.5
  other v2: 11.75,1.5 11.75,3.5 11.75,5.5 11.75,7.5 7,9 9,9 11,9 44.5,40.9 44.5,42.614 44.5,44.329 44.5,46.043 16.25,47.75 18.25,47.75 20.25,47.75 22.25,47.75 24.25,47.75 26.25,47.75 28.25,47.75 30.25,47.75 32.25,47.75 34.25,47.75 36.25,47.75 38.25,47.75 40.25,47.75 42.25,47.75 44.25,47.75 48.25,47.75
  other v4: 6.7,39.4 6.2,39.9 7.2,39.9 6.7,40.4
  other v5: 42.5,12.5
GPS_ANT: *.1 C1.2 C6.1 | length 5.9
  Top Layer w1: *.1 3.766,7.563 C6.1 3.802,9.488 C1.2
GPS_ANT_Tuning: C1.1 C5.1 P5.3 pad.2 pad.3 R1.2 | length 3.4
  Top Layer w1: pad.2 3.802,16.412 C1.1
GPS_RESET: U1.11 U2.9 | length 99.7
  Top Layer w0.254: U2.9 2.732,28.268 ccw(c3,28.268) 3,28 v1(4,28) ; v1(11.25,28) v1(14.25,28) ; v1(46.6,27.475) 48.15,27.475 cw(c48.15,27.15) U1.11@48.475,27.15
  Bottom Layer w0.254: v1(4,28) v1(11.25,28) ; v1(14.25,28) 14.25,1.75 14.5,1.5 33.101,1.5 33.25,1.649 33.25,26.75 33.975,27.475 v1(46.6,27.475)
GPS_RX: U1.12 U2.2 | length 92.9
  Top Layer w0.254: U2.2 10.432,27.818 ccw(c10.75,27.818) 10.75,27.5 14,27.5 cw(c14,27.25) 14.25,27.25 14.25,2 ccw(c14.75,2) 14.75,1.5 32.5,1.5 ccw(c32.5,2) 33,2 v1(33,27.5) ; v1(46.6,28.475) 48.4,28.475 cw(c48.4,28.4) U1.12@48.475,28.4
  Bottom Layer w0.254: v1(33,27.5) 33,28.25 cw(c33.225,28.25) 33.225,28.475 v1(46.6,28.475)
GPS_TX: U1.13 U2.3 | length 95.7
  Top Layer w0.254: U2.3 9.332,27.168 ccw(c9.5,27.168) 9.5,27 13.5,27 cw(c13.5,26.75) 13.75,26.75 13.75,2 ccw(c14.75,2) 14.75,1 32.5,1 ccw(c32.5,2) 33.5,2 v1(33.5,29) ; v1(46.5,29.75) 48.305,29.75 cw(c48.305,29.65) U1.13
  Bottom Layer w0.254: v1(33.5,29) 44.5,29 ccw(c44.5,29.25) 44.75,29.25 44.75,29.5 cw(c45,29.5) 45,29.75 v1(46.5,29.75)
IMU_INTN: R5.2 U1.8 U3.14 | length 28.4
  Top Layer w0.254: v1(41.5,25) 45.5,25 cw(c45.5,24.5) 46,24.5 46,24 ccw(c46.5,24) 46.5,23.5 48.375,23.5 cw(c48.375,23.4) U1.8@48.475,23.4 ; v1(41.648,8.361) cw(c41.648,7.445) 42.564,7.445 U3.14 42.591,7.129 42.591,5.515 R5.2
  Bottom Layer w0.254: v1(41.5,25) 41.5,8.509 ccw(c41.648,8.509) v1(41.648,8.361)
IMU_RESET: R15.2 U1.7 U3.11 | length 28
  Top Layer w0.254: v1(40.48,8.386) cw(c40.48,7.802) 41.064,7.802 U3.11 41.064,5.844 ccw(c41.5,5.844) R15.2@41.5,5.408 ; v1(40.5,24) 45,24 cw(c45,23.5) 45.5,23.5 ccw(c46,23.5) 46,23 cw(c46,22.775) 46.225,22.775 U1.7@46.225,21.15
  Bottom Layer w0.254: v1(40.48,8.386) 40.636,8.386 ccw(c40.636,8.75) 41,8.75 41,23.75 ccw(c40.75,23.75) 40.75,24 v1(40.5,24)
LoRa_ANT: A1.1 C2.2 C3.1 | length 3.6
  Top Layer w1.3: C2.2 46,45.5 46.024,45.524 A1.1
  other v3: 28.024,53 30.024,53 32.024,53 34.024,53 36.024,53 38.024,53 40.024,53 42.024,53 44.024,53 28.024,59 30.024,59 32.024,59 34.024,59 36.024,59 38.024,59 40.024,59 42.024,59 44.024,59 46.024,59
LoRa_ANT_Tuning: C2.1 C4.1 P4.3 pad.1 R2.2 | length 4.1
  Top Layer w1.3: C2.1 cw(c46,41.45) 46.1,41.45 R2.2
MISO: U1.26 U6.2 | length 23
  Top Layer w0.254: U1.26 cw(c36.505,25.9) 36.505,26 39.5,26 ccw(c39.5,26.5) 40,26.5 v1(40,30.5) ; v1(40,42.5) cw(c40.34,42.5) 40.34,42.84 U6.2
  Bottom Layer w0.254: v1(40,30.5) 40.077,40.971 ccw(c39.6,40.975) 40.076,40.999 v1(40,42.5)
MOSI: U1.27 U6.5 | length 27.7
  Top Layer w0.254: U1.27 ccw(c36.555,24.65) 36.555,24.5 40,24.5 ccw(c40,25) 40.5,25 v1(40.5,29.5) ; U6.5 39.695,45.38 cw(c39.695,44.475) v1(40.6,44.475)
  Bottom Layer w0.254: v1(40.5,29.5) 40.5,36.914 40.6,37.014 v1(40.6,44.475)
NetC14_1: C14.1 U3.27 Y1.2 | length 6.3
  Top Layer w0.254: C14.1@36.846,14.3 36.849,14.3 36.849,12.9 36.849,11.651 ccw(c37,11.651) 37,11.5 39,11.5 cw(c39,11) 39.5,11 39.5,10.431 ccw(c39.564,10.431) U3.27
NetC16_1: C16.1 U3.26 Y1.1 | length 4.3
  Top Layer w0.254: C16.1@39.354,14.3 39.354,12.9 39.351,12.9 cw(c39.351,12.187) 40.064,12.187 U3.26
NetC17_2: C17.2 U3.9 | length 1.8
  Top Layer w0.254: U3.9 40.082,7.225 40.082,5.472 C17.2
NetC20_1: C20.1 U4.4 | length 4.3
  Top Layer w0.15: C20.1 1.849,36.704 1.961,36.816 1.961,37.211 4.15,39.4 U4.4
NetD1_2: D1.2 R4.2 | length 2.5
  Top Layer w0.15: R4.2@37,37.25 ccw(c37.05,37.25) 37.05,37.2 D1.2
NetD2_2: D2.2 R3.2 | length 2.5
  Top Layer w0.254: D2.2 ccw(c10.45,11.55) 10.5,11.55 R3.2
NetL1_2: L1.2 U4.20
NetL2_1: L2.1 U4.16
NetP1_3: P1.3 R16.1 | length 2
  Bottom Layer w1.3: P1.3 R16.1
NetPV1_1: pad.5@32,46 PV1.1 PV2.1 R7.1 | length 17.2
  Top Layer w0.254: 29,45.5 30,45.5 31.5,45.5 ccw(c31.5,46) pad.5@32,46
  Top Layer w1: R7.1 v6(23.5,46.7) 23.5,46 23.5,44.5
  Bottom Layer w1: 23.5,44.5 v6(23.5,46.7)
NetR3_1: R3.1 U2.4 | length 16.8
  Top Layer w0.254: U2.4 cw(c8.232,30.079) 8.25,30.079 8.25,26.75 ccw(c8.5,26.75) 8.5,26.5 v1(10.5,26.5) ; R3.1@10.5,15.404 v1(10.5,17.5)
  Bottom Layer w0.254: v1(10.5,17.5) v1(10.5,26.5)
NetR4_1: R4.1 U1.21 | length 3.2
  Top Layer w0.254: R4.1 37.5,34.519 37.846,34.173 38.332,34.173 38.655,33.85 U1.21
NetR10_2: R10.2 U3.4 | length 2.7
  Top Layer w0.254: R10.2 cw(c35.909,8.5) 35.909,8.555 U3.4
NetR11_2: R11.2 U3.5 | length 2.9
  Top Layer w0.254: R11.2 cw(c37.351,6.954) 37.351,8.055 U3.5
NetR12_1: R12.1 U5.2 | length 5.3
  Top Layer w0.15: R12.1 46.25,1.25 ccw(c46.25,1.5) 46.5,1.5 46.5,3.5 cw(c46.65,3.5) 46.65,3.65 U5.2
NetR13_2: R13.2 U3.6 | length 1.8
  Top Layer w0.254: U3.6 cw(c38.564,7.207) 38.6,7.207 R13.2
NetR14_1: R14.1 U3.18 | length 2.9
  Top Layer w0.15: U3.18 44.649,9.055 cw(c44.649,8.204) R14.1
NetR17_1: R17.1 U3.17 | length 1.7
  Top Layer w0.15: U3.17 43.899,8.555 cw(c43.899,7.954) R17.1
NetR19_2: R19.2 R20.1 U4.3 | length 7.4
  Top Layer w0.15: R20.1 0.7,37.95 1,38.25 1,38.375 ; R19.2 1,38.375 ; U4.3 3.9,39.9 2.375,38.375 1,38.375
NetR21_2: R21.2 SW1.2 U4.5 | length 27.4
  Top Layer w0.15: v1(0.75,45.25) 0.75,45.345 0.908,45.503 0.908,47.387 R21.2 0.796,56.296 1,56.5 cw(c1.25,56.5) 1.25,56.75 2.75,56.75 ccw(c2.75,57) 3,57 3,58 cw(c3.25,58) 3.25,58.25 SW1.2 ; v1(3.75,38.25) 3.817,38.317 4.107,38.317 U4.5
  Bottom Layer w0.15: v1(0.75,45.25) 0.25,44.75 0.25,38.775 0.775,38.25 v1(3.75,38.25)
NetR22_1: R22.1 R26.2 U4.7 | length 4.5
  Top Layer w0.15: R26.2 R22.1 4.5,36.75 5,37.25 6,37.25 6.2,37.45 U4.7
NetR22_2: R22.2 R23.2 R24.2 U4.8 | length 8.6
  Top Layer w0.15: R22.2 5.25,35.546 ; R23.2 5.25,35.546 ; U4.8 6.7,37.295 6.5,37.095 v1(6.5,37) 5.75,37 5.25,36.5 5.25,35.546 ; v1(9,37) R24.2
  Bottom Layer w0.15: v1(6.5,37) v1(9,37)
NetR23_1: R23.1 R25.2 U4.10 | length 5.5
  Top Layer w0.15: U4.10 7.7,37.2 6.954,36.454 R23.1 6,36.2 6.2,36 7.401,36 7.901,35.5 R25.2
NetR24_1: R24.1 R27.2 U4.12 | length 3
  Top Layer w0.15: U4.12 8.9,39.4 9.504,38.796 R27.2 R24.1
NetR25_1: R25.1 R28.2 U4.11 | length 3.7
  Top Layer w0.15: R25.1 R28.2@9,36.408 ; R25.1@8.02,36.408 8.133,36.52 8.133,36.733 8.425,37.025 U4.11
NRST: J1.8 R6.1 U1.17 | length 23.2
  Top Layer w0.15: U1.17@43.725,33.15 43.725,26.575 ccw(c43.75,26.575) v1(43.75,26.55) ; R6.1 45.349,15.842 46.191,15 J1.8
  Bottom Layer w0.15: v1(43.75,26.55) 43.75,26 ccw(c44,26) 44,25.75 45.5,25.75 cw(c45.5,25.5) 45.75,25.5 45.75,15.25 ccw(c46,15.25) 46,15 J1.8
PI_NETWORK_GPS: R1.1 U2.11 | length 2.7
  Top Layer w1: R1.1 U2.11 U2.11@3.832,21
PI_NETWORK_LoRa: R2.1 U1.15 | length 2.4
  Top Layer w0.9: R2.1 46.155,35.52 U1.15
RX: J1.7 U1.9 | length 16.9
  Top Layer w0.15: v1(46.5,25.5) ccw(c47.35,25.5) 47.35,24.65 U1.9 U1.9@48.475,24.65
  Bottom Layer w0.15: v1(46.5,25.5) 46.5,19 ccw(c46.75,19) 46.75,18.75 49.25,18.75 cw(c49.25,18.5) 49.5,18.5 49.5,18.485 49.503,15.253 cw(c49.25,15.253) 49.25,15 J1.7
SCK: U1.24 U6.6 | length 19.3
  Top Layer w0.254: U1.24 cw(c36.505,28.4) 36.505,28.5 38.5,28.5 ccw(c38.5,29) 39,29 v1(39,31) ; U6.6 37.965,44.11 cw(c37.965,42.975) v1(39.1,42.975)
  Bottom Layer w0.254: v1(39,31) v1(39.1,42.975)
SCL: R8.1 U1.5 U3.19 U5.4 U7.7 | length 100
  Top Layer w0.254: U7.7 11.55,33.45 11.969,33.869 11.969,34.469 v1(12,34.5) ; U3.19 ccw(c43.125,10.176) 43.746,10.176 43.746,11.5 ; U1.5@43.725,21.15 cw(c43.725,21.129) 43.746,21.129 43.746,11.5 ; U5.4 48.6,2.35 ccw(c48.6,2.5) 48.75,2.5 ; v1(48.5,1.5) ccw(c48.5,1.75) 48.75,1.75 48.75,2.5 ; 43.746,11.5 45.75,11.5 cw(c45.75,11) 46.25,11 46.25,9.25 ccw(c46.5,9.25) 46.5,9 48,9 cw(c48,8.25) 48.75,8.25 48.75,2.5
  Bottom Layer w0.254: v1(12,34.5) 13.351,34.5 13.5,34.351 13.5,1.5 14,1 45,1 45.5,1.5 v1(48.5,1.5)
SDA: R9.1 U1.6 U3.20 U5.3 U7.8 | length 100.9
  Top Layer w0.254: U7.8 11.083,33.95 11.133,34 v1(11.2,34) ; U3.20 v1(43.064,14.75) ; v1(44.25,10.75) 45.5,10.75 cw(c45.5,10.5) 45.75,10.5 45.75,9 ccw(c46.25,9) 46.25,8.5 47.75,8.5 cw(c47.75,8) 48.25,8 48.25,3.25 cw(c48,3.25) 48,3 U5.3 47.5,3 ccw(c47.5,2.5) 47,2.5 v1(47,1) ; v1(44.5,18.5) ccw(c44.5,18.975) 44.975,18.975 U1.6@44.975,21.15
  Bottom Layer w0.254: v1(11.2,34) 12.851,34 13,33.851 13,1 13.5,0.5 46.478,0.5 46.978,1 v1(47,1) ; v1(44.25,10.75) 44.25,13.564 ccw(c43.064,13.564) v1(43.064,14.75) 43.064,17.564 cw(c44,17.564) 44,18.5 v1(44.5,18.5)
Solar_Positive: C19.1 L1.1 R7.2 R19.1 U4.2 | length 16.2
  Top Layer w0.254: 2.463,41.537 3.6,40.4 U4.2
  Top Layer w0.5: L1.1 1.75,46.5 1.9,46.65 2.355,46.65 3.455,47.75 11.35,47.75 11.65,47.45 11.65,47.1 R7.2
SWCLK: J1.6 U1.4 | length 15.9
  Top Layer w0.15: U1.4@42.475,21.15 42.475,22.475 cw(c43.5,22.475) v1(43.5,23.5)
  Bottom Layer w0.15: v1(43.5,23.5) 45,23.5 cw(c45,23) 45.5,23 45.5,14 ccw(c45.75,14) 45.75,13.75 46.98,13.75 cw(c46.98,13.73) J1.6
SWDIO: J1.4 U1.3 | length 17.5
  Top Layer w0.15: U1.3@41.225,21.15 41.225,22.225 cw(c42,22.225) v1(42,23)
  Bottom Layer w0.15: v1(42,23) 44.5,23 cw(c44.5,22.5) 45,22.5 45,12.75 ccw(c45.25,12.75) 45.25,12.5 46.96,12.5 cw(c46.96,12.46) J1.4
TX: J1.3 U1.10 | length 20.2
  Top Layer w0.15: v1(46.5,26.5) ccw(c47.1,26.5) 47.1,25.9 U1.10@48.475,25.9
  Bottom Layer w0.15: v1(46.5,26.5) 47,26 47,19.5 ccw(c47.25,19.5) 47.25,19.25 49.5,19.25 cw(c49.5,19) 49.75,19 49.75,18.485 ccw(c49.9,18.485) 49.751,18.466 cw(c49.503,18.433) 49.753,18.433 49.753,15.253 cw(c49.25,15.253) 49.751,15.203 ccw(c49.9,15.187) 49.75,15.187 49.75,12.75 cw(c49.5,12.75) 49.5,12.5 48.58,12.5 ccw(c48.58,12.44) J1.3@48.52,12.44
VCC: C7.1 C9.1 C10.1 C12.1 C13.1 C15.2 C18.1 C21.1 J1.1 L2.2 pad.VCC R5.1 R6.2 R8.2 R9.2 R10.1 R12.2 R14.2 R15.1 R18.2 U1.1 U2.6 U2.7 U2.8 U3.3 U3.28 U4.14 U5.5 U5.6 U5.8 U6.8 | length 212.7
  Top Layer w0.15: U3.3 ccw(c38.502,9.553) 39,9.553 U3.28@39,10.304
  Top Layer w0.254: C9.1 C10.1 4.908,30.121 U2.7 ; 5,33 5.7,33 5.7,32.3 6.1,31.9 11.6,31.9 12.45,32.75 v1(12.5,32.75) 13,33.25 13,37 12,38 11,38 11,40.4 ; U2.6@6,30.098 U2.6 ; U4.14 11,40.4 ; L2.2 11.073,43 13.148,43 36,43 cw(c36,42.75) 36.25,42.75 36.25,40.5 ccw(c36.5,40.5) 36.5,40.25 C18.1 ; C21.1 11,41.454 11,40.4 ; R10.1 34,8.5 ; R18.2 C18.1 ; U6.8 ccw(c37.376,41.49) 37.296,41.49 C18.1 ; U1.1@38.402,20.499 36.409,20.499 C7.1 ccw(c36.204,20.454) 36.204,20.5 35,20.5 ccw(c35,19.5) 34,19.5 34,18.5 ; U3.3 37.4,9.055 C15.2 34.054,9.046 cw(c34.054,9.1) 34,9.1 ; U3.28@39,10.304 cw(c39.064,10.304) U3.28 ; R15.1@41.5,4.5 41.5,3.5 ; R9.2 cw(c42.146,14.146) 42,14.146 42,17.75 ; R5.1 42.8,4.486 42.8,3.5 ; R8.2 42,17.75 ; R6.2 45.25,18 45.75,18.5 49.25,18.5 49.5,18.25 49.5,11 ; 45.5,2.825 cw(c45.429,2.825) 45.429,2.754 C13.1 C12.1 ; U5.8 45,4.3 ccw(c45,4.2) 44.9,4.2 44.9,3.7 cw(c44.746,3.7) 44.746,3.546 C12.1 ; R14.2 45.5,6 cw(c45.25,6) 45.25,5.75 43.75,5.75 ccw(c43.75,5.5) 43.5,5.5 v1(43.5,3.5) ; J1.1 cw(c48.33,11.19) 48.33,11.25 49.25,11.25 cw(c49.25,11) 49.5,11 ; 34,8.5 34,9.1 ; 34,8.5 34,3.5 41.5,3.5 ; 34,9.1 34,18.5 ; 34,18.5 41.5,18.5 cw(c41.5,18) 42,18 42,17.75 ; 41.5,3.5 42.8,3.5 ; 42.8,3.5 v1(43.5,3.5) ; v1(43.5,3.5) cw(c43.5,3.454) 43.546,3.454 R12.2 43.546,0.704 ccw(c43.75,0.704) 43.75,0.5 49.25,0.5 ccw(c49.25,0.75) 49.5,0.75 49.5,11 ; v1(43.5,3.5) 44.254,3.5 ccw(c44.254,3.546) C12.1
  Top Layer w0.3: v1(12,11.5) cw(c12,11) 12.5,11 12.5,0.676 12.676,0.5 33.824,0.5 34,0.676 34,2 ; 34,3.5 34,2 ; pad.VCC 34,2
  Bottom Layer w0.3: v1(12,11.5) 12,32.25 v1(12.5,32.75)
VSTOR: C8.1 C11.1 R29.2 U4.6 U4.19 | length 15.1
  Top Layer w0.15: v1(4,37.4) 4.775,38.175 U4.6 ; 6.2,42.175 6.2,42.45 v1(6.446,42.696) C8.1@6.446,45.412 ; C8.1@6.446,45.662 6.446,46.912 6.534,47 R29.2
  Top Layer w0.25: U4.19 6.2,42.175
  Bottom Layer w0.15: v1(4,37.4) 4.4,37.8 4.4,41.8 4.9,42.3 6.05,42.3 v1(6.446,42.696)
pads on no net: *.2 J1. P3.3 SW1.3 SW1.4 U1.18 U1.19 U1.23 U1.28 U2.5 U2.13 U2.14 U2.15 U2.16 U2.17 U2.18 U3.1 U3.7 U3.8 U3.12 U3.13 U3.15 U3.16 U3.21 U3.22 U3.23 U3.24 U6.3 U6.7 U7.5

## Polygon pours and split planes (outlines as drawn)
GND on Top Layer "TOP_GND" (solid, remove dead copper, shelved, pour order 21): 1.27,0 cw(c1.27,1.27) 0,1.27 0,58.73 cw(c1.27,58.73) 1.27,60 48.73,60 cw(c48.73,58.73) 50,58.73 50,1.27 cw(c48.73,1.27) 48.73,0
Bat_Positive on Top Layer "BAT_POS_Voltage_Sense" (solid, shelved, pour order 17): 8.652,33.577 6.819,33.577 6.814,33.571 6.814,33.196 7.466,33.196 7.839,32.823 8.652,32.823
VCC on Top Layer "VCC_BQ" (solid, shelved, pour order 20): 10.2,43 10.2,42.35 10.75,41.8 10.75,41.2 11.15,41.2 11.2,41.25 11.2,43
NetL2_1 on Top Layer "LBUCK" (solid, shelved, pour order 19): 7.56,42.05 8,42.49 8,42.9 9,42.9 9,42.4 7.84,41.695 7.56,41.695
NetL1_2 on Top Layer "LBOOST_Pour" (solid, shelved, pour order 18): 4.05,43.572 4.05,42.6 4.655,42.6 5.56,41.695 5.84,41.695 5.84,43.485 5.75,43.575
Solar_Positive on Top Layer "NONET_L-01_P-001" (solid, shelved, pour order 16): 2.95,43.425 2.95,41.225 2.775,41.05 0.675,41.05 0.687,43.137 1.35,43.425
VCC on Top Layer "VCC_BME" (solid, shelved, pour order 13): 45.26,3.174 45.75,3.174 45.75,2.176 45.26,2.176
VCC on Top Layer "GPS_VCC" (solid, shelved, pour order 9): 3.393,29.198 3.393,30.998 6.432,30.998 6.432,29.198
GND on Bottom Layer "BOT_GND" (solid, remove dead copper, shelved, pour order 23): 1.27,0 cw(c1.27,1.27) 0,1.27 0,58.73 cw(c1.27,58.73) 1.27,60 48.73,60 cw(c48.73,58.73) 50,58.73 50,1.27 cw(c48.73,1.27) 48.73,0

## Keep-outs
Keep-Out Layer:
  rectangle: 0,0 11.5,8.6
  rectangle: 38.803,7.624 42.816,10.037
  region: 50,60 50,48 2.75,48 0,48 0,53 0,60

## Silkscreen, mask and mechanical layers (free items; w line width, h text height)
Top Overlay:
  lines w0.15: 0.5,27.5 1.25,27.5 ; 0.5,47.75 0.5,48 1.25,48 ; 1,43.75 1,42.5 1.25,42.25 2.25,42.25 2.5,42.25 ; 1.25,31.5 2,31.5 2.25,31.25 ; 2.25,27.5 2.5,27.5 2.75,27.75 ; 6,43.3 6.2,43.1 ; 6,45.3 6.2,45.1 ; 7.25,44.5 7.5,44.25 ; 7.25,46.5 7.5,46.25 ; 7.3,36.3 7.5,36.5 ; 8.6,35.4 8.8,35.9 ; 8.75,46.5 9,46.5 9,46.75 9,47.5 8.75,47.5 ; 10.25,46 11.5,46 11.5,45 ; 10.6,36 11.015,35.377 11.9,35.2 ; 11.9,47.8 14.6,47.8 14.85,47.55 ; 12.5,31.5 12.5,37.5 ; 34,26 33.5,26 33.5,28.5 34,28.5 ; 34.5,29.5 34.5,37.5 ; 34.75,36 35,35.5 35.75,35.5 36,36 ; 34.8,2.7 35,2.9 39.1,2.9 ; 35.25,33.75 36.5,32.5 ; 35.75,34.25 37,33 ; 38.6,34.9 38.6,36.2 ; 38.8,38.4 42.3,38.4 42.3,38 ; 39.5,4.5 39.5,4.2 40.6,4.2 40.6,4.5 ; 41,4.5 41,4.2 ; 42.1,4.5 42.1,4.2 ; 43.2,4.5 43.2,4.2 42.1,4.2 ; 41,4.2 42.1,4.2 ; 41,4.2 42.1,4.2
  lines w0.152: 0.4,35.1 0.5,36 ; 0.5,40.5 0.5,40 1,40 ; 1.3,35 1.5,35.4 ; 1.5,13.75 1,13.75 1,15.75 1.5,15.75 ; 2,40 2.5,40 2.5,40.5 ; 2.25,35 2.5,35.5 ; 2.5,16 2.25,16 2.25,19.25 2.5,19.25 ; 2.75,9 2.5,9 2.5,10.25 2.75,10.25 ; 3.6,33 3.9,33 ; 3.75,35 4,35.5 ; 3.9,32 3.6,32 3.6,34 3.9,34 ; 5,11.25 5.25,11.25 5.25,13.25 5,13.25 ; 5.25,35 5.5,35.5 ; 7.5,12 7.5,12.5 9.5,12.5 ; 9.5,14 9.5,17 10,17 ; 10.5,36.5 10.75,36.5 10.75,38.4 ; 10.5,40 10.75,40 10.75,38.8 ; 10.6,42 11.3,42 11.3,41.5 ; 34.5,8.25 34.5,8 36.25,8 36.25,8.25 ; 35.75,6.5 35.75,5.5 36.5,5.5 ; 36,12 35.75,12 35.75,13.75 36,13.75 ; 36.5,14.75 36.5,15 37.75,15 ; 36.55,19.1 36.8,19.1 36.8,19.85 ; 36.75,9 36.5,9 36.5,10 36.75,10 ; 36.75,39.5 36.75,38.75 37,38.75 ; 36.75,40 36.75,40.75 37,40.75 ; 38.25,4.25 38,4.25 38,5.75 38.25,5.75 ; 38.5,15 39.75,15 39.75,14.75 ; 41.7,13.8 41.7,14.6 42.5,14.6 ; 43,39.75 43,39 43,38.5 43.5,38.5 ; 43.25,0.75 43,0.75 43,1.75 43.25,1.75 ; 43.7,1.875 43.7,3.125 43.95,3.125 ; 43.75,17.25 44,17.25 44,18 ; 43.8,4.575 43.8,4.825 44.55,4.825 ; 44,8 44,8.25 44.75,8.25 ; 44.75,35.75 44.5,35.75 44.5,37.5 44.75,37.5 ; 45.75,8.75 46,8.75 46,7.25 ; 47.25,40.75 47.5,40.75 47.5,44 47.25,44 ; 48.25,46.75 49,46.75 49,45.5 ; 48.5,9.5 48.5,10.25 49.25,10.25 ; 10,17 ccw(c10,17) 10,17 ; 10,17 10,17
  text "Solar" at 27.08,46.85 h0.5
  text "S+" at 24.7,46.7 h0.8
  text "STO" at 6.227,45.745 h0.5 r45
  text "S+" at 33.58,45.58 h0.5
  text "BYP" at 6.227,43.745 h0.5 r45
  text "CVOUT" at 12.17,41.58 h0.5 r90
  text "OUT1" at 11.67,38.78 h0.5 r90
  text "OC2" at 0.92,38.28 h0.5 r90
  text "CIN" at 2.42,38.28 h0.5 r90
  text "OUT2" at 11.08,37.83 h0.5
  text "OK2" at 7.32,34.68 h0.5 r90
  text "OK1" at 8.38,34.68 h0.5
  text "B+" at 10.58,34.58 h0.5
  text "B-" at 35.08,34.58 h0.5
  text "OV1" at 1.83,34.33 h0.5
  text "OV2" at 3.33,34.33 h0.5
  text "OK3" at 5.08,34.33 h0.5
  text "OC1" at 0.62,33.68 h0.5 r90
  text "CREF" at 1.52,32.98 h0.5 r90
  text "GPS_RST" at 0.837,28.08 h0.5 r90
  text "SPI" at 32.92,27.08 h0.5 r90
  text "C" at 43.48,19.595 h0.5 r270
  text "D" at 44.78,19.595 h0.5 r270
  text "1" at 38.92,19.33 h0.5 r90
  text "RST" at 44.755,14.805 h0.5
  text "RX" at 49.42,14.58 h0.5 r90
  text "CLK" at 44.755,13.555 h0.5
  text "DIO" at 44.755,12.305 h0.5
  text "TX" at 49.42,12.08 h0.5 r90
  text "VC" at 49.42,10.83 h0.5 r90
  text "S-" at 24.7,0.7 h0.8
  text "VCC" at 35.08,0.33 h0.5
  text "GND" at 37.58,0.33 h0.5
  text "GND" at 39.834,0.33 h0.5
Bottom Overlay:
  lines w0.15: 3.5,33.8 3.3,33.8 3.3,35.5 3.5,35.5 ; 9.5,37.5 9.5,39.5 ; 9.5,41 9.5,42.5 ; 11,47 15,47 15,46 15,45.5 ; 37.5,37.5 37.5,39.5 ; 37.5,41 37.5,42.5
  lines w0.152: 43.25,34.25 49.75,34.25 ; 43.25,37.75 49.75,37.75 ; 46.75,32.055 46.75,39.75 ; 7.5,50.75 10.5,50.75 10.5,53.75 ; 7.5,50.75 8,51.25 8,50.25 7.5,50.75 ; 10.5,53.75 10,53.25 11,53.25 10.5,53.75
  lines w0.254: 43.75,30.5 cw(c44.5,30.5) 44.5,31.25 ; 44.5,29.75 ccw(c44.5,30.5) 45.25,30.5
  text "BOARD SIZE: W = 50" at 13.696,58.305 h0.5
  text "DeSCENT CHIPSAT" at 26.576,58.175 h0.8
  text "BOARD SIZE: H = 60" at 13.696,57.305 h0.5
  text "Ver 2.5.0" at 23.8,56.45 h0.8
  text "To user: Put R4 First" at 13.696,56.33 h0.5
  text "R0" at 16.42,56.33 h0.5
  text "LoRa Room Based 0.15mm Clearance Constraint" at 25.67,55.33 h0.5